# EAGLE board lv1b-imu-daughter-1 (EAGLE 3.55)
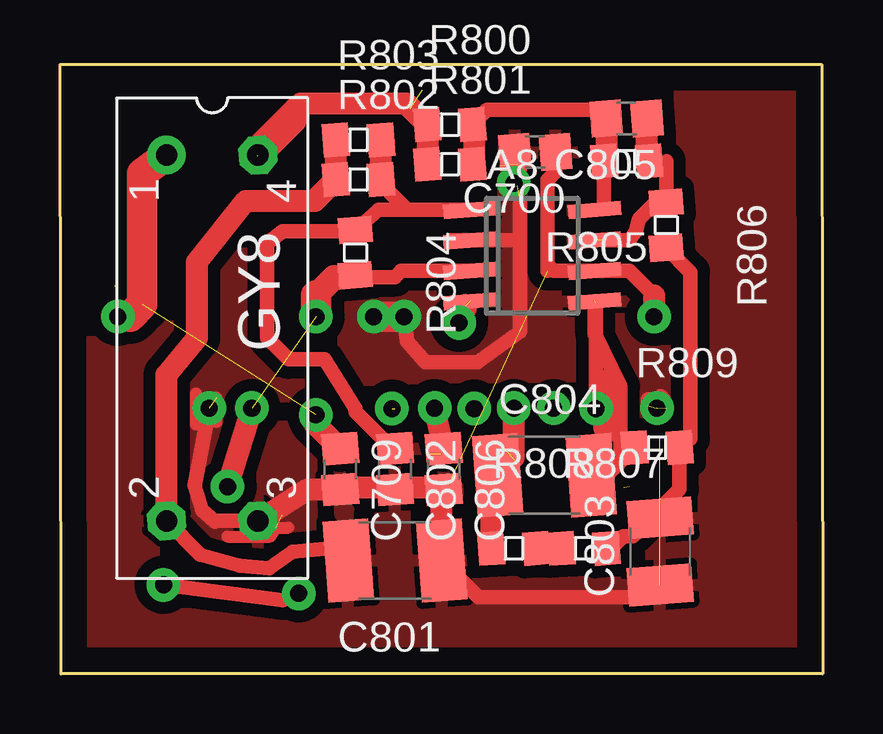
[diagram p0: board, top side]
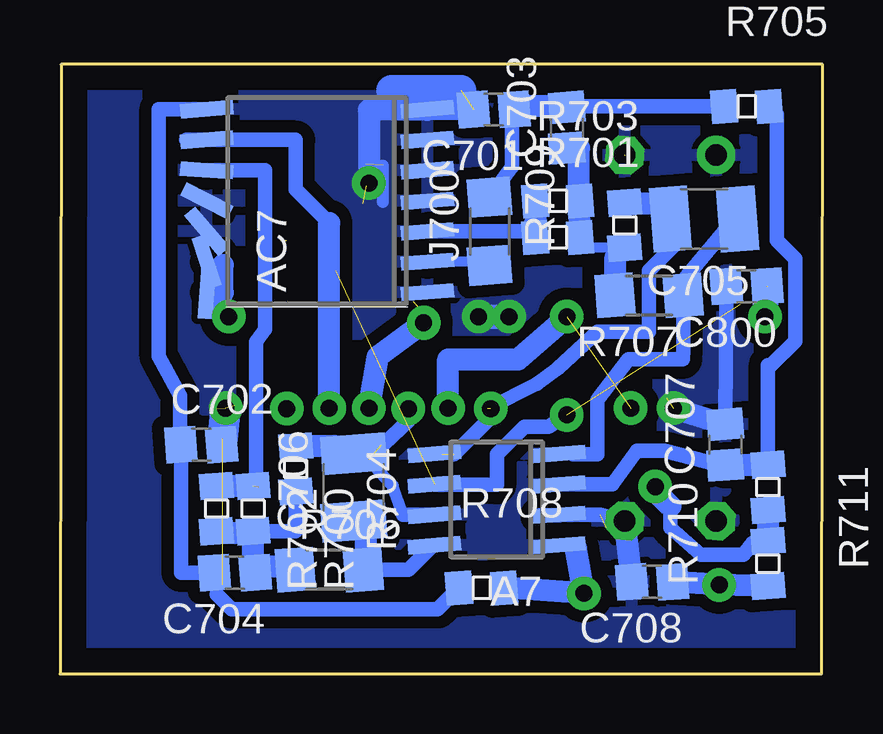
[diagram p1: board, bottom side, seen from below]

Size 31.8 x 25.4 mm. Coordinates in mm from the lower left corner, seen from the top.
Outline: 0,25.4 31.75,25.4 31.8,0 0.05,0 0,25.4
Copper layers used: Top, Bottom

## Footprints (pad centres in the part's own frame; a part is rotated, then mirrored left to right if it is on the bottom)
8 = smd 0.6 x 2.2 rotated 4.4:  -0.635,-2.6 | smd 0.6 x 2.2 rotated 4.8:  -0.635,2.6 | smd 0.6 x 2.2 rotated 4.3:  -1.905,-2.6 | smd 0.6 x 2.2 rotated 4.5:  0.635,-2.6 | smd 0.6 x 2.2 rotated 4.6:  1.905,-2.6 | smd 0.6 x 2.2 rotated 4.9:  -1.905,2.6 | smd 0.6 x 2.2 rotated 4.7:  0.635,2.6;  1.905,2.6
14W = smd 0.6 x 2.2 rotated 4.4:  -2.54,-4.6 | smd 0.6 x 2.2 rotated 71.8:  -2.54,4.6 | smd 0.6 x 2.2 rotated 4.3:  -3.81,-4.6;  1.27,4.6 | smd 0.6 x 2.2 rotated 4.5:  -1.27,-4.6 | smd 0.6 x 2.2 rotated 4.6:  0,-4.6 | smd 0.6 x 2.2 rotated 94.3:  -3.81,4.6 | smd 0.6 x 2.2 rotated 49.3:  -1.27,4.6 | smd 0.6 x 2.2 rotated 26.8:  0,4.6 | smd 0.6 x 2.2 rotated 4.7:  2.54,-4.6;  1.27,-4.6 | smd 0.6 x 2.2 rotated 5:  2.54,4.6 | smd 0.6 x 2.2 rotated 4.8:  3.81,-4.6 | smd 0.6 x 2.2 rotated 4.9:  3.81,4.6
012 = smd 1.3 x 1.5 rotated 4.3:  -0.85,0 | smd 1.3 x 1.5 rotated 4.4:  0.85,0
210 = smd 1.6 x 2.7 rotated 4.3:  -1.4,0 | smd 1.6 x 2.7 rotated 4.4:  1.4,0
532 = smd 1.9 x 3.4 rotated 4.3:  -1.95,0 | smd 1.9 x 3.4 rotated 4.4:  1.95,0
812 = smd 1.9 x 3.4 rotated 4.3:  -1.95,0 | smd 1.9 x 3.4 rotated 4.4:  1.95,0
RO_NOP = drill 0.889 pad 1.6 round:  -8.89,-3.81 | drill 0.889 pad 1.6 octagon:  6.35,-3.81;  6.35,0;  -8.89,0
206 = smd 1.6 x 1.803 rotated 4.4:  1.422,0 | smd 1.6 x 1.803 rotated 4.3:  -1.422,0
05 = smd 1.092 x 1.397 rotated 4.4:  0.94,0 | smd 1.092 x 1.397 rotated 4.3:  -0.94,0

## Placement (x,y rotation side)
A7  1013  [8]  13.59,7.26 90 bottom
A8  1013  [8]  19.69,17.42 270 top
AC7  ADXL250  [14W]  21.08,19.71 90 bottom
C700  .1  [012]  19.81,21.74 180 top
C701  .1  [012]  13.72,23.52 180 bottom
C702  .1  [012]  25.91,9.55 0 bottom
C703  .0027  [012]  10.67,22.76 90 bottom
C704  .0027  [012]  24.51,4.22 180 bottom
C705  .015  [210]  4.95,18.95 180 bottom
C706  .015  [210]  19.56,7.77 90 bottom
C707  ?  [012]  4.06,9.55 90 bottom
C708  ?  [012]  7.11,3.84 180 bottom
C709  .1  [012]  11.68,8.53 270 top
C800  .1  [012]  3.18,16.15 180 bottom
C801  10  [532]  13.97,4.72 180 top
C802  ?  [012]  13.97,8.53 270 top
C803  .022  [210]  25.02,5.11 90 top
C804  .056  [812]  20.19,8.28 0 top
C805  ?  [012]  23.62,23.14 180 top
C806  .1  [012]  16,8.53 270 top
GY8  [RO_NOP]  8.26,12.73 270 top
J700  0  [206]  13.89,18.44 90 bottom
R700  100k  [05]  23.75,6.88 270 bottom
R701  100k  [05]  11.05,18.19 0 bottom
R702  100k  [05]  25.27,6.88 270 bottom
R703  100k  [05]  11.05,19.71 0 bottom
R704  100k  [05]  21.97,8.53 270 bottom
R705  100k  [05]  3.18,23.65 0 bottom
R706  6.19k  [206]  20.57,4.34 0 bottom
R707  6.19k  [206]  7.24,15.77 180 bottom
R708  100k  [05]  14.22,3.58 0 bottom
R709  100k  [05]  8.26,18.69 90 bottom
R710  100k  [05]  2.29,4.6 90 bottom
R711  100k  [05]  2.29,7.77 270 bottom
R800  10k  [05]  16.26,22.89 0 top
R801  10k  [05]  16.26,21.23 0 top
R802  10k  [05]  12.45,20.6 0 top
R803  10k  [05]  12.45,22.25 0 top
R804  100k  [05]  12.32,17.55 270 top
R805  100k  [05]  23.62,21.36 180 top
R806  100k  [05]  25.27,18.69 270 top
R807  10k  [05]  21.84,5.23 0 top
R808  10k  [05]  18.92,5.23 0 top
R809  100k  [05]  24.89,9.42 0 top

## Library data of the parts
A7 A8 AC7 C700-C709 C800 C802 C803 C805 C806 J700 R706 R707 = ipc-smd
C801 C804 = ipc-rcl
GY8 = imu_anal
R700-R705 R708-R711 R800-R809 = smd

## Nets
6V: A7. A8. AC7. C700. C709. C800. GY8.
7A+: A7. C708. R708. R710.
7A-: A7. C706. R706.
7B+: A7. C707. R705. R711.
7B-: A7. C705. R707.
7QOUT: AC7. R701. R703.
7QREF1: AC7. J700.
7QREF2: C701. C703. J700. R705.
7ZOUT: AC7. R700. R702.
7ZREF: AC7. C702. C704. R708.
8A+: A8. C802. R802. R803. R804.
8A-: A8. C805. R800. R801. R805.
8AO: A8. C805. R805. R806.
8B-: A8. C804. R808.
8GOUT: GY8. R800. R801.
8GREF: C801. GY8. R802. R803.
GND: A7. A8. AC7. C700. C701. C707. C708. C709. C800. C801. C802. C803. C806. GY8.
QFILT: C703. R701. R703. R707. R709.
QO: A7. C705. R709.
S$22: R807. R808.
THFILT: C803. R806. R807. R809.
THOUT: A8. C804. R809.
VREF: A8. C806. R710. R711. R804.
ZFILT: C704. R700. R702. R704. R706.
ZO: A7. C706. R704.

## Tracks (layer width: path | path; a pad name or v marks a point on that pad's centre or on a via)
6V  (via drill 0.71 pad 1.4)  (3 unrouted)
  Top 0.406: 10.54,10.53 v10.67,10.8 | 21.21,16.79 20.57,16.79 20.32,16.79 | 20.32,20.57 20.32,20.6 | 20.66,20.92 20.66,21.74 | v2.41,14.88 2.92,14.88
  Top 0.61: 20.32,16.79 20.32,20.57 20.66,20.92 | 20.45,16.92 20.57,16.79 22.29,16.79 23.75,16.79 24.77,15.77
  Top 0.914: 11.68,9.38 10.54,10.53 | 24.77,15.77 v24.77,14.88
  Top 1.27: 4.45,21.62 3.43,20.85 3.43,15.39 2.92,14.88
  Bottom 0.406: 16.19,7.87 16.19,7.9 | 25.68,17.17 25.65,17.17 25.53,17.04 25.02,17.04 | 25.27,15.9 25.68,15.9 | 25.27,15.9 25.02,15.9 | 25.27,15.65 25.27,15.9
  Bottom 0.61: 16.19,7.87 13.59,7.87 13.59,9.14 12.45,10.29 11.43,10.29 v10.67,10.8
  Bottom 0.914: 25.02,15.9 25.02,17.04
  Bottom 1.016: v24.77,14.88 25.27,15.65 | v2.41,14.88 2.29,16.15
7A+  (via drill 0.71 pad 1.4)
  Top 0.61: v4.32,3.71 9.27,3.07 v9.96,3.35
  Bottom 0.406: 13.08,3.71 13.21,3.58 13.28,3.58 | 10.29,5.23 10.99,5.36
  Bottom 0.914: R710. v4.32,3.71 6.26,3.84 | 13.21,3.58 v9.96,3.35 10.29,5.23
7A-
  Bottom 0.406: 19.15,4.34 19.05,4.34 | 19.05,6.37 19.56,6.37 | 16.26,5.36 16.19,5.36
  Bottom 0.61: 19.15,4.34 17.27,4.34 16.26,5.36
  Bottom 0.914: 19.05,4.34 19.05,6.37
7B+
  Bottom 0.406: 4.06,8.7 4.06,8.53 4.19,8.66 | R711. 2.29,8.66 2.33,8.7 | 1.91,23.32 2.24,23.65 | 2.29,12.85 2.16,12.85
  Bottom 0.61: 10.99,7.9 8.76,7.9 7.75,9.3 6.6,9.3 4.19,8.66 | 1.91,23.32 1.91,18.06 1.14,17.3 1.14,13.87 2.16,12.85 | R711. 2.29,12.85
  Bottom 0.914: 2.33,8.7 4.06,8.7
7B-
  Bottom 0.406: 3.68,18.95 3.55,18.95 | R707. 5.82,15.67 5.84,15.65 5.71,16.54 | 10.99,9.17 10.54,9.17 10.41,9.3 10.41,9.14 10.54,9.14
  Bottom 0.61: 5.71,16.54 3.68,18.95 | R707. 5.82,13.51 5.84,13.11 8.1,13.11 9.4,11.43 9.4,9.14 10.41,9.14
7QOUT
  Bottom 0.406: R701. 12.07,18.44 | 11.94,19.58 R703.
  Bottom 0.61: 12.07,18.44 16.48,18.44
  Bottom 0.914: R701. 11.94,19.58
7QREF1
  Bottom 0.406: J700. 14.07,17.02 14.22,17.17 16.48,17.17
7QREF2
  Bottom 0.406: 12.95,23.52 12.87,23.52 12.74,23.65 | 10.67,23.65 C703. 10.63,23.65
  Bottom 0.61: 13.89,19.86 12.95,21.13 12.95,23.52 | R705. 10.63,23.65
  Bottom 0.914: 10.67,23.65 12.74,23.65
7ZOUT  (1 unrouted)
  Bottom 0.406: 23.62,8 23.52,7.77 23.37,7.77 | R702. 25.27,7.77
  Bottom 0.61: 25.68,20.98 23.24,20.98 23.24,14.35 23.62,13.84 23.62,8
  Bottom 0.914: R700. R702.
7ZREF
  Bottom 0.406: 26.76,9.55 26.8,9.3 | C704. 25.27,4.22 25.27,3.33 | 26.76,4.22 26.8,4.22
  Bottom 0.61: AC7. 27.69,23.52 27.69,13.23 26.8,11.58 26.8,9.3 | 26.76,9.55 26.76,4.22 C704. | R708. 16.05,2.69 24.64,2.69 25.27,3.33
8A+
  Top 0.406: 12.32,18.44 R804. | 13.34,20.47 13.39,20.52 13.39,20.6 | 13.39,22.25 13.39,22.17 13.34,22.12 13.39,22.07 | 13.97,9.38 13.97,9.4 13.84,9.4 | 12.32,10.92 12.32,11.05
  Top 0.61: 12.32,18.44 9.27,18.44 8.64,17.93 8.64,13.99 9.52,13.11 11.02,13.11 12.32,11.05 | 14.48,19.33 17.09,19.33 | 14.48,19.33 13.34,20.47 | R804. 13.28,19.33 14.48,19.33 | 13.84,9.4 12.32,10.92
  Top 0.914: 13.39,20.6 13.39,22.07
8A-
  Top 0.406: 17.27,22.88 17.2,22.88 | 17.2,21.23 17.27,21.31 | 22.68,21.36 22.68,21.29 22.73,21.23 22.77,21.27 | 22.29,19.33 22.48,19.33 22.68,19.53 | C805. 22.63,23.14 22.61,23.11 22.23,23.49
  Top 0.61: 22.68,21.29 22.68,19.53 | 17.2,22.88 17.8,23.49 22.23,23.49
  Top 0.914: 17.27,21.31 17.27,22.88 | C805. 22.77,21.27
8AO  (1 unrouted)
  Top 0.406: 24.47,21.4 24.51,21.36 R805. 25.27,21.36 | 25.27,19.58 R806. 24.82,19.63 | 22.29,18.06 22.35,18.06
  Top 0.61: R806. 25.27,21.36 | 24.82,19.63 24.13,18.95 24,18.44 23.75,18.06 22.61,18.06
  Top 0.914: 24.47,21.4 24.47,23.14
8B-  (via drill 0.71 pad 1.4)  (1 unrouted)
  Top 0.406: 18.92,9.02 18.29,8.38 18.29,8.32 18.24,8.28 18.24,7.98 17.98,7.72
  Top 0.914: 18.92,9.02 v18.92,11.07 | R808. 17.98,7.72
  Top 1.016: v16.64,14.63 16.89,15.33
  Bottom 0.914: v16.64,14.63 18.54,13.23 v18.92,11.07
8GOUT  (1 unrouted)
  Top 0.406: R800. 15.32,22.76 15.37,22.76 | GY8. 8.26,22
  Top 0.914: 15.32,22.76 R801. | R800. 14.43,23.77 10.03,23.77 8.26,22
  Top 1.27: 8.23,21.59 8.23,21.69 9.65,23.11
8GREF
  Top 0.406: C801. 12.07,4.6 11.05,5.21 | R802. 11.51,20.52 11.56,20.47
  Top 0.61: 4.45,6.38 5.84,4.95 7.52,4.5 8.71,4.39 9.7,5.08 11.05,5.21
  Top 0.914: R803. R802. 10.62,19.71 7.75,19.71 5.71,17.17 5.71,13.99 4.45,12.47 4.45,6.38
GND  (via drill 0.71 pad 1.4)  (8 unrouted)
  Top 0.406: 24.13,3.2 25.02,3.71 | 15.88,4.77 15.92,4.72 | 15.88,7.64 15.96,7.64 C806. 15.91,7.77 | 14.06,7.77 C802. 13.88,7.77 | C709. 11.68,7.77 | 19.18,18.06 18.29,18.06
  Top 0.508: 6.53,10.49 6.53,11.51 | 5.66,11.68 5.66,10.39 | 6.98,5.71 8.76,5.71 9.02,6.1 9.52,6.1
  Top 0.61: 24.13,3.2 17.44,3.2 15.92,4.72 | v6.22,11.07 5.61,7.85 5.92,6.81 6.45,6.35 | 19.05,21.23 18.96,21.32 | 19.18,18.06 17.09,18.06 | 19.18,18.06 19.18,19.58 | 19.18,18.06 19.18,14.25 17.4,12.98 15.24,12.98 14.48,13.87 v14.35,14.88
  Top 0.635: 8.26,6.38 6.45,6.35 | 24.51,11.43 24.51,11.18 | 25.27,11.05 25.17,11.43 25.04,11.56
  Top 0.914: 15.88,7.64 15.88,4.77 | 14.06,7.77 15.91,7.77 | 11.68,7.77 13.88,7.77 | C709. 10.33,7.68 8.26,6.38 | C700. 18.92,21.36 | 19.05,20.34 v18.92,20.45 19.05,21.23
  Top 1.27: v14.35,14.88 v13.08,14.88
  Bottom 0.406: 25.27,9.55 25.02,9.8 | C707. 4.06,10.44 | 16.48,23.52 16.48,23.49
  Bottom 0.508: 18.34,19.66 18.34,21.18
  Bottom 0.61: 4.06,10.44 C800. | 10.99,6.63 9.27,6.63 8.26,6.38
  Bottom 0.914: v6.22,11.07 C707. | C708. 8.26,6.38 | C701. 16.48,23.52 | 16.48,23.49 18.92,23.49 v18.92,20.45
  Bottom 1.016: v14.35,14.88 v13.08,14.88
  Bottom 1.27: 25.02,9.8 v24.89,11.07 | 15.09,24.31 17.98,24.31
  pour Top (isolate 0.508): 0,25.4 31.75,25.4 31.75,0 0,0
  pour Bottom (isolate 0.508): 0,25.4 31.75,25.4 31.75,0 0,0
QFILT
  Bottom 0.406: 10.16,19.71 10.11,19.71 10.16,19.76 10.16,19.58 | 10.16,21.91 10.67,21.91 | 10.11,18.19 10.03,18.19 9.6,17.76 R709. 8.64,17.37 | 8.66,15.77 8.64,15.77
  Bottom 0.914: 10.11,18.19 10.16,19.71 | 10.16,19.76 10.16,21.91 | 8.64,15.77 8.64,17.37
QO  (via drill 0.71 pad 1.4)  (2 unrouted)
  Bottom 0.406: 6.1,17.93 6.1,18.95 C705. 6.73,19.58 | 8.26,19.58 8.26,19.63 | 7.24,14.25 7.24,14.38 | A7. 16.16,9.14 15.88,9.14 | 13.97,11.05 13.97,10.54
  Bottom 0.61: 6.1,17.93 7.24,16.79 7.24,14.38 | 7.24,14.25 9.4,14.25 11.05,12.73 11.91,12.09 13.97,11.05 | 13.97,10.54 15.37,9.14
  Bottom 0.914: 6.73,19.58 8.26,19.58
  other vias: 13.84,11.05
S$1
  Top 1.27: 22.86,12.06 22.86,10.29
S$2
  Top 0.61: 17.04,18.06 16.31,18.06
S$3
  Bottom 0.61: 10.95,6.6 11.81,6.6
S$4
  Bottom 0.508: 14.88,23.06 14.38,23.06 14.35,23.09
S$22
  Top 0.406: 19.81,5.23 19.86,5.23 R807.
ST  (via drill 0.71 pad 1.4)
  Bottom 0.61: 26.54,22.25 21.97,22.25 21.97,20.19 20.57,18.8
  Bottom 0.914: v20.57,11.07 20.57,18.8
THFILT
  Top 0.406: 25.83,9.35 25.78,9.3 | 25.83,9.35 26.29,9.8 | 25.83,9.42 25.83,9.35 | 25.02,6.88 C803. | 22.78,5.23 22.99,5.23
  Top 0.61: 25.27,17.76 26.29,16.74 26.29,9.8 | 25.83,9.42 25.83,7.7 25.02,6.88 23.88,5.74 23.5,5.74 22.99,5.23
THOUT  (via drill 0.71 pad 1.4)  (1 unrouted)
  Top 0.406: C804. 22.81,8.28 | R809. 23.88,9.42 23.37,9.3
  Top 0.61: A8. 22.29,14.19 23.37,11.96 23.37,9.3 | 22.81,8.28 R809. | v22.35,11.05 22.35,15.49
VREF  (via drill 0.71 pad 1.4)  (1 unrouted)
  Top 0.406: 12.45,16.54 12.32,16.61 12.19,16.54
  Top 0.61: 17.09,16.79 14.22,16.79 13.97,16.54 12.45,16.54 | 11.43,16.54 12.19,16.54
  Top 0.914: v6.98,7.8 v8,11.07 | 16,9.38 v15.62,11.07
  Top 1.016: 10.67,15.77 11.43,16.54
  Top 1.27: v10.67,14.88 10.67,15.77
  Bottom 0.406: 2.29,5.54 2.29,6.83 | 2.29,5.46 2.92,5.46 | 6.86,7.49 v6.98,7.8
  Bottom 0.61: 2.92,5.46 3.3,4.95 5.08,4.95 6.35,6.1 6.35,6.98
  Bottom 0.914: 2.29,6.83 2.29,5.46 | 6.35,6.98 6.86,7.49 | v15.62,11.07 15.62,13.11 12.7,13.11 v10.67,14.88
ZFILT
  Bottom 0.406: 21.97,7.59 22.23,7.34 21.97,7.34 21.97,7.39 | 23.62,4.47 23.62,4.26 23.66,4.22 23.75,4.3 | R706. 22.12,4.47 | 25.27,5.87 25.27,5.94 | 23.75,5.94 23.83,5.87
  Bottom 0.61: 23.75,5.94 21.97,5.94 21.97,7.34
  Bottom 0.914: 22.12,4.47 23.62,4.47 | 23.75,4.3 23.75,5.94 | 23.83,5.87 25.27,5.87
ZO  (via drill 0.71 pad 1.4)  (1 unrouted)
  Bottom 0.406: 18.93,8.92 C706. 20.19,9.42 20.19,9.3 20.24,9.47 | R704. 22.48,9.55 | v17.27,11.05 17.27,10.54
  Bottom 0.508: 17.5,6.63 17.93,7.85 18.93,8.92
  Bottom 0.61: 16.19,6.63 17.5,6.63 | 18.41,9.52 18.31,9.58 17.27,10.54
  Bottom 0.914: 20.24,9.47 R704.

## Text on the board
Document: (-) | Xadj | NC | ST | TP | Xout | NC | NC | Yout | A+ | A- | NC | (-) | AO | Yadj | B+ | (+) | Vdd | NC | B- | BO | Vdd | B- | BO | B+ | (+) | (-) | AO | A+ | A-